# Altium PCB A1.PcbDoc (part 2 of 3)
Units mil, origin at the board's own origin, x right, y up, seen from the top; angles counter-clockwise.
Board outline 3937.01 x 3149.61 mil, 2 copper layers (Top Layer, Bottom Layer); 91 components, 93 nets, 317 pads, 42 vias.
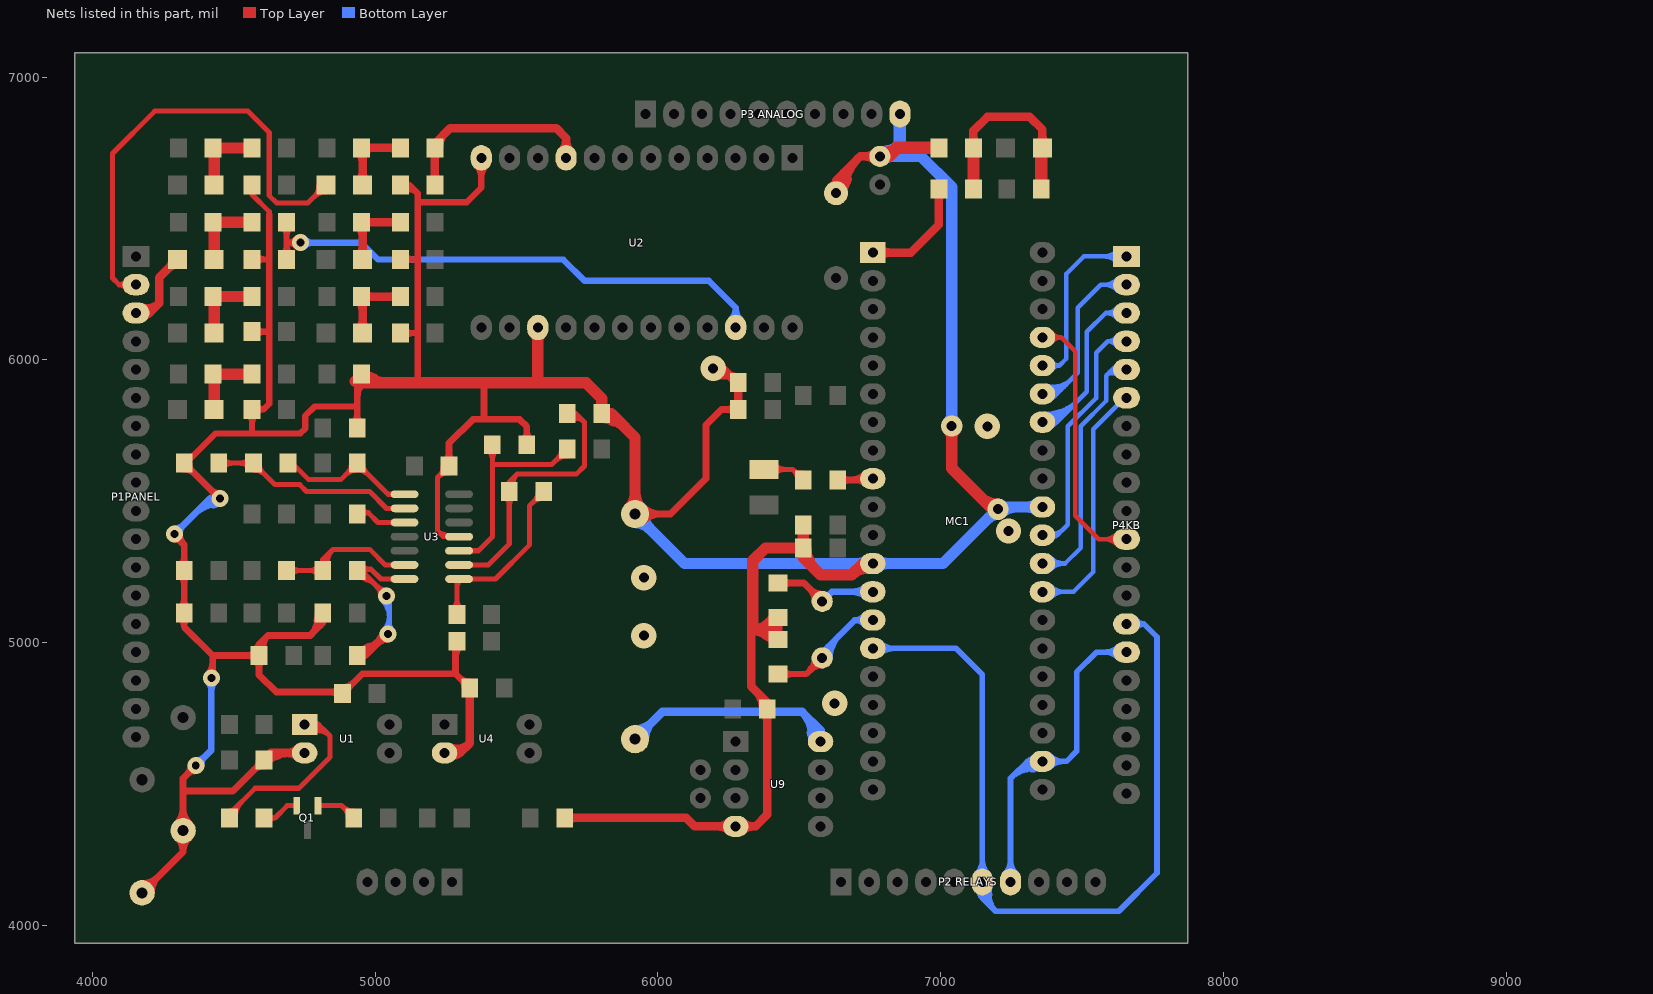
[diagram p2: the nets of this part, all layers, seen from the top]

## Via types
v1: diameter 60, hole 28, Top Layer to Bottom Layer, 31 vias
v2: diameter 90, hole 35.43, Top Layer to Bottom Layer, 6 vias
v3: diameter 75, hole 28, Top Layer to Bottom Layer, 3 vias
v4: diameter 75, hole 35.43, Top Layer to Bottom Layer, 2 vias

## Nets (pads, with @x,y where several pads share a name; then routed paths per layer and width w, separated by ;. In a path a pad name is that pad's centre, name@x,y a point inside that pad or via, vN(x,y) a via of type N, cw(c..) or ccw(c..) an arc to the next point about the centre after c; other vN are vias at no path point) (continued)
GND: "P3 ANALOG.10" BT1.2 C1.1 C2.1 C3.1 C4.1 C5.1 C10.1 C11.1 C12.1 C13.2 C14.1 C15.2 C16.1 C17.1 C18.1 C19.1 C20.1 C21.1 C22.1 C46.1 C57.2 C68.1 C69.1 C70.2 D3.1 D4.1 D9.1 MC1.12 MC1.31 R6.2 R13.1 R19.1 R28.1 R30.2 R64.1 R107.2 R108.1 U1.2 U2.12 U2.15 U3.11 U4.2 U9.4 | length 31016.5
  Top Layer w18: C16.1@4563.98,6618.61 4563.98,6585.56 4625,6524.54 4625,6515 ; 5239.64,5383.88 cw(c5234.41,5357.08) U3.11@5257.06,5372.33 ; C12.1@5261.02,5625 5220,5583.98 ; U3.11@5296.46,5375 5240,5375 5220,5395 ; 5220,5395 ccw(c5257.07,5432.07) 5260.69,5379.77 cw(c5257.07,5432.07) 5220,5395 ; 5220,5395 5220,5583.98 ; 5220,5583.98 cw(c5259.99,5543.99) 5260.75,5600.54 ccw(c5259.99,5543.99) 5220,5583.98 ; 5228.77,5592.74 ccw(c5200.44,5621.06) 5240.5,5621.06 cw(c5200.44,5621.06) 5228.77,5592.74
  Top Layer w22: R6.2@4323.98,5635 4330,5635 4435,5740 4735,5740 4752.2,5757.2 4752.2,5802.2 4785,5835 4931.02,5835 4936.02,5840 ; 4563.98,5748.98 C21.1@4563.98,5825 4605,5825 ; C1.1@4563.98,6100 4625,6100 ; C19.1@4563.98,6355.82 4620.82,6355.82 4625,6360 ; 4625,6515 4625,6360 ; C18.1@5088.98,6095 5150,6095 ; C22.1@5088.98,6355.82 5149.18,6355.82 5150,6355 ; C17.1@5088.98,6618.61 5121.39,6618.61 ; 5150,5919 5150,6095 ; U2.12@5375,6715 5375,6610 5323.14,6558.14 5156.86,6558.14 5150,6565 ; v2@6188.46,5962.44 ccw(c6246.03,6028.97) 6252.37,5941.22 ; v2(6195,5970) 6233.98,5970 C20.1@6283.98,5920 ; v2@6201.08,5959.65 cw(c6217.13,5932.31) 6239.55,5954.73 ; v2@6212.21,5940.68 cw(c6232.02,5906.95) C20.1@6259.67,5934.61 ; v2@6236.2,5958.08 cw(c6204.14,5902.55) C20.1@6266.08,5919.14 ; C20.1@6259.96,5944.36 ccw(c6272.62,5966.3) C20.1@6279.18,5941.83 ; C20.1@6265.94,5919.68 ccw(c6237.19,5912.9) 6251.96,5938.48 ccw(c6262.14,5956.12) C20.1@6273.57,5939.27 ; 4563.98,5776.33 ccw(c4519.25,5776.33) 4550.88,5807.96 cw(c4519.25,5776.33) 4563.98,5776.33 ; 4563.98,5776.33 cw(c4608.71,5776.33) 4577.08,5807.96 ccw(c4608.71,5776.33) 4563.98,5776.33 ; 4605,5825 ccw(c4605,5788.85) 4577.88,5812.75 cw(c4605,5788.85) 4605,5825 ; 4605,5825 cw(c4605,5861.15) 4577.88,5837.25 ccw(c4605,5861.15) 4605,5825 ; 4605,5825 4625,5845 4625,6100 ; 4608.71,6100 ccw(c4608.71,6055.27) 4577.08,6086.9 cw(c4608.71,6055.27) 4608.71,6100 ; 4608.71,6100 cw(c4608.71,6144.73) 4577.08,6113.1 ccw(c4608.71,6144.73) 4608.71,6100 ; 4608.71,6355.82 ccw(c4608.71,6311.09) 4577.08,6342.72 cw(c4608.71,6311.09) 4608.71,6355.82 ; 4608.71,6355.82 cw(c4608.71,6400.55) 4577.08,6368.92 ccw(c4608.71,6400.55) 4608.71,6355.82 ; 4625,6100 4625,6360 ; 5121.39,6618.61 ccw(c5121.39,6599.51) 5104.94,6609.2 cw(c5121.39,6599.51) 5121.39,6618.61 ; 5121.39,6618.61 cw(c5121.39,6637.7) 5104.94,6628.01 ccw(c5121.39,6637.7) 5121.39,6618.61 ; 5121.39,6618.61 5150,6590 ; 5133.71,6095 ccw(c5133.71,6050.27) 5102.08,6081.9 cw(c5133.71,6050.27) 5133.71,6095 ; 5133.71,6095 cw(c5133.71,6139.73) 5102.08,6108.1 ccw(c5133.71,6139.73) 5133.71,6095 ; 5133.71,6355.82 ccw(c5133.71,6311.09) 5102.08,6342.72 cw(c5133.71,6311.09) 5133.71,6355.82 ; 5133.71,6355.82 cw(c5133.71,6400.55) 5102.08,6368.92 ccw(c5133.71,6400.55) 5133.71,6355.82 ; 5150,6095 5150,6355 ; 5150,6355 5150,6565 ; 5150,6565 5150,6590 ; 5150,6590 ccw(c5118.12,6558.12) 5097.46,6598.2 cw(c5118.12,6558.12) 5150,6590 ; 5375,6643.52 ccw(c5311.02,6643.52) 5356.26,6688.76 cw(c5311.02,6643.52) 5375,6643.52 ; 5375,6643.52 cw(c5438.98,6643.52) 5393.74,6688.76 ccw(c5438.98,6643.52) 5375,6643.52 ; C17.1@5087.39,6617.76 cw(c5103.62,6586.24) 5128.69,6611.31 ccw(c5103.62,6586.24) C17.1@5087.39,6617.76 ; v2@6198.93,5958.66 cw(c6218,5903.69) 6259.14,5944.84 ccw(c6218,5903.69) v2@6198.93,5958.66 ; v2@6206.14,5937.88 cw(c6230.79,5866.82) C20.1@6283.98,5920 ccw(c6230.79,5866.82) v2@6206.14,5937.88 ; 6245.63,5958.35 ccw(c6283.98,5996.7) 6283.98,5942.46 cw(c6283.98,5996.7) 6245.63,5958.35 ; C20.1@6255.13,5948.84 cw(c6230.22,5923.94) 6265.45,5923.94 ccw(c6230.22,5923.94) C20.1@6255.13,5948.84
  Top Layer w24: D4.1@4175,4115 4320,4260 ; v1(4290,5385) 4290,5380 4323.98,5346.02 R13.1@4323.98,5255 R108.1@4323.98,5105 4323.98,5056.02 4425,4955 ; R6.2@4323.98,5635 4448.98,5510 v1(4450,5510) ; v1(4365,4565) 4320,4520 4320,4475 ; v1(4420,4875) 4425,4880 4425,4955 ; C13.2@4593.81,4954.63 ccw(c4562.32,4982.7) C13.2@4604.43,4985.11 ; R28.1@4606.02,4585 4496.02,4475 4320,4475 ; R64.1@4793.19,5078.88 cw(c4834.81,5072.07) R64.1@4810.2,5106.32 ; R64.1@4813.98,5105 4813.98,5068.98 ; C10.1@4883.98,4820 4953.98,4890 5283.98,4890 ; C10.1@4886.46,4840 4883.98,4840 4868.98,4825 4650,4825 4588.98,4886.02 C13.2@4588.98,4955 ; C57.2@4939.02,5743 4936.02,5740 C57.2@4936.02,5760 4936.02,5840 4936.02,5935 C5.1@4951.02,5950 ; C5.1@4939.11,5933.21 cw(c4920.93,5913.58) 4944.1,5900.21 ; C12.1@5261.02,5625 5261.02,5706.02 5345,5790 5385,5790 ; C15.2@5288.98,4975 5283.98,4970 5283.98,4890 ; C4.1@5333.98,4840 5283.98,4890 ; 5385,5919 5385,5790 ; R107.2@5536.02,5700 5536.02,5763.98 5510,5790 5385,5790 ; BT1.2@5919,5454.99 6044.99,5454.99 6170,5580 6170,5770 6225,5825 C14.1@6283.98,5825 ; 4231.33,4171.33 ccw(c4287.67,4115) 4208,4115 cw(c4287.67,4115) 4231.33,4171.33 ; 4231.33,4171.33 cw(c4175,4227.67) 4175,4148 ccw(c4175,4227.67) 4231.33,4171.33 ; 4320,4260 ccw(c4251.28,4260) 4297.71,4310.67 cw(c4251.28,4260) 4320,4260 ; 4320,4260 cw(c4388.72,4260) 4342.29,4310.67 ccw(c4388.72,4260) 4320,4260 ; 4320,4260 D3.1@4320,4335 4320,4475 ; 4320,4414.67 ccw(c4399.67,4414.67) 4343.33,4358.33 cw(c4399.67,4414.67) 4320,4414.67 ; 4320,4414.67 cw(c4240.33,4414.67) 4296.67,4358.33 ccw(c4240.33,4414.67) 4320,4414.67 ; 4323.98,5058.75 ccw(c4281.66,5058.75) 4311.58,5088.67 cw(c4281.66,5058.75) 4323.98,5058.75 ; 4323.98,5058.75 cw(c4366.29,5058.75) 4336.37,5088.67 ccw(c4366.29,5058.75) 4323.98,5058.75 ; 4323.98,5151.25 ccw(c4366.29,5151.25) 4336.37,5121.33 cw(c4366.29,5151.25) 4323.98,5151.25 ; 4323.98,5151.25 cw(c4281.66,5151.25) 4311.58,5121.33 ccw(c4281.66,5151.25) 4323.98,5151.25 ; 4323.98,5208.75 ccw(c4281.66,5208.75) 4311.58,5238.67 cw(c4281.66,5208.75) 4323.98,5208.75 ; 4323.98,5208.75 cw(c4366.29,5208.75) 4336.37,5238.67 ccw(c4366.29,5208.75) 4323.98,5208.75 ; 4323.98,5301.25 ccw(c4366.29,5301.25) 4336.37,5271.33 cw(c4366.29,5301.25) 4323.98,5301.25 ; 4323.98,5301.25 cw(c4281.66,5301.25) 4311.58,5271.33 ccw(c4281.66,5301.25) 4323.98,5301.25 ; 4334.27,4534.27 ccw(c4303.54,4565) 4347,4565 cw(c4303.54,4565) 4334.27,4534.27 ; 4334.27,4534.27 cw(c4365,4503.54) 4365,4547 ccw(c4365,4503.54) 4334.27,4534.27 ; 4425,4955 C13.2@4588.98,4955 ; 4546.66,4955 ccw(c4546.66,4997.32) 4576.58,4967.39 cw(c4546.66,4997.32) 4546.66,4955 ; 4546.66,4955 cw(c4546.66,4912.68) 4576.58,4942.61 ccw(c4546.66,4912.68) 4546.66,4955 ; 4588.98,4908.75 ccw(c4546.66,4908.75) 4576.58,4938.67 cw(c4546.66,4908.75) 4588.98,4908.75 ; 4588.98,4908.75 cw(c4631.29,4908.75) 4601.37,4938.67 ccw(c4631.29,4908.75) 4588.98,4908.75 ; C13.2@4588.98,4955 4588.98,4993.98 4620,5025 ; 4588.98,4993.97 ccw(c4615.23,4993.97) 4599.49,4972.96 cw(c4615.23,4993.97) 4588.98,4993.97 ; 4588.98,4993.97 cw(c4562.72,4993.97) 4578.47,4972.96 ccw(c4562.72,4993.97) 4588.98,4993.97 ; 4620,5025 ccw(c4661.95,4983.05) 4605.62,4964.44 cw(c4661.95,4983.05) 4620,5025 ; 4620,5025 4770,5025 ; 4770,5025 ccw(c4704.84,5090.16) 4796.54,5099.32 cw(c4704.84,5090.16) 4770,5025 ; 4770,5025 4813.98,5068.98 ; 4813.98,5068.98 ccw(c4793.37,5068.98) 4804.51,5086.31 cw(c4793.37,5068.98) 4813.98,5068.98 ; 4813.98,5068.98 cw(c4834.58,5068.98) 4823.45,5086.31 ccw(c4834.58,5068.98) 4813.98,5068.98 ; 4936.02,5806.25 ccw(c4978.34,5806.25) 4948.42,5776.33 cw(c4978.34,5806.25) 4936.02,5806.25 ; 4936.02,5806.25 cw(c4893.71,5806.25) 4923.63,5776.33 ccw(c4893.71,5806.25) 4936.02,5806.25 ; 5261.02,5671.25 ccw(c5303.34,5671.25) 5273.42,5641.33 cw(c5303.34,5671.25) 5261.02,5671.25 ; 5261.02,5671.25 cw(c5218.71,5671.25) 5248.63,5641.33 ccw(c5218.71,5671.25) 5261.02,5671.25 ; C15.2@5276.58,4988.67 cw(c5258.73,4970.82) 5283.98,4970.82 ; C15.2@5276.58,4988.67 cw(c5258.73,4970.82) 5283.98,4970.82 ; C15.2@5276.58,4988.67 cw(c5258.73,4970.82) 5283.98,4970.82 ; C15.2@5276.58,4988.67 cw(c5258.73,4970.82) 5283.98,4970.82 ; 5536.02,5746.25 ccw(c5578.34,5746.25) 5548.42,5716.33 cw(c5578.34,5746.25) 5536.02,5746.25 ; 5536.02,5746.25 cw(c5493.71,5746.25) 5523.63,5716.33 ccw(c5493.71,5746.25) 5536.02,5746.25 ; 6010.74,5454.99 ccw(c6010.74,5363.25) 5945.87,5428.12 cw(c6010.74,5363.25) 6010.74,5454.99 ; 6010.74,5454.99 cw(c6010.74,5546.73) 5945.87,5481.86 ccw(c6010.74,5546.73) 6010.74,5454.99 ; 6241.66,5825 ccw(c6241.66,5867.32) 6271.58,5837.39 cw(c6241.66,5867.32) 6241.66,5825 ; 6241.66,5825 cw(c6241.66,5782.68) 6271.58,5812.61 ccw(c6241.66,5782.68) 6241.66,5825 ; v1@4290,5367 cw(c4290,5335.62) 4312.19,5357.81 ccw(c4290,5335.62) v1@4290,5367 ; v1@4308,5384.9 ccw(c4362.54,5384.59) 4323.97,5346.03 cw(c4362.54,5384.59) v1@4308,5384.9 ; R6.2@4323.98,5613.54 cw(c4323.98,5561.72) 4360.62,5598.36 ccw(c4323.98,5561.72) R6.2@4323.98,5613.54 ; R6.2@4341.5,5631.06 ccw(c4374.31,5631.06) 4351.11,5607.86 cw(c4374.31,5631.06) R6.2@4341.5,5631.06 ; v1@4407.27,4887.73 ccw(c4364.47,4930.53) 4425,4930.53 cw(c4364.47,4930.53) v1@4407.27,4887.73 ; 4417.52,5541.45 ccw(c4450,5573.93) 4450,5528 cw(c4450,5573.93) 4417.52,5541.45 ; 4420,5538.98 cw(c4391.02,5510) 4432,5510 ccw(c4391.02,5510) 4420,5538.98 ; 4425,4906.38 ccw(c4451.38,4906.38) 4432.73,4887.73 cw(c4451.38,4906.38) 4425,4906.38 ; 4569.38,4548.36 cw(c4606.02,4511.72) 4606.02,4563.54 ccw(c4606.02,4511.72) 4569.38,4548.36 ; R28.1@4578.89,4557.86 ccw(c4555.69,4581.06) 4588.5,4581.06 cw(c4555.69,4581.06) R28.1@4578.89,4557.86 ; C13.2@4582.83,4956.91 cw(c4620.55,4969.37) 4592.46,4997.46 ccw(c4620.55,4969.37) C13.2@4582.83,4956.91 ; 4805.82,5060.82 ccw(c4769.97,5096.67) 4820.42,5101.71 cw(c4769.97,5096.67) 4805.82,5060.82 ; 4839.09,4825 cw(c4839.09,4779.06) 4871.58,4811.54 ccw(c4839.09,4779.06) 4839.09,4825 ; 4844.23,4825 ccw(c4844.23,4863.69) 4871.58,4836.33 cw(c4844.23,4863.69) 4844.23,4825 ; C10.1@4883.98,4841.46 ccw(c4883.98,4893.28) 4920.62,4856.64 cw(c4883.98,4893.28) C10.1@4883.98,4841.46 ; C10.1@4901.5,4823.94 cw(c4934.31,4823.94) 4911.11,4847.14 ccw(c4934.31,4823.94) C10.1@4901.5,4823.94 ; 4936.02,5867.53 cw(c5029.55,5867.53) 4963.42,5933.67 ccw(c5029.55,5867.53) 4936.02,5867.53 ; 5283.98,4946.68 cw(c5343.36,4946.68) 5301.37,4988.67 ccw(c5343.36,4946.68) 5283.98,4946.68 ; 5283.98,4969.6 cw(c5299.68,4969.6) 5294.62,4984.47 ccw(c5299.68,4969.6) 5283.98,4969.6 ; 5297.33,4876.64 ccw(c5333.98,4913.28) 5333.98,4861.46 cw(c5333.98,4913.28) 5297.33,4876.64 ; C4.1@5306.84,4867.14 cw(c5283.64,4843.94) 5316.45,4843.94 ccw(c5283.64,4843.94) C4.1@5306.84,4867.14
  Top Layer w30: R28.1@4606.02,4585 4631.02,4610 U1.2@4750,4610 ; R28.1@4612.95,4601.71 ccw(c4634.56,4641.58) 4657.24,4602.3 ; U4.2@5245,4610 5300,4610 ; C4.1@5333.98,4840 5333.98,4643.98 5300,4610 ; R30.2@5670,4380 6100,4380 6130,4350 U9.4@6275,4350 6345,4350 6386.02,4391.02 C46.1@6386.02,4765 6386.02,4788.98 6330,4845 6330,5285 6335,5290 ; C14.1@6283.98,5825 C20.1@6283.98,5920 ; C3.1@6425,5011.02 C2.1@6425,5088.98 ; D9.1@6620.55,6615.83 ccw(c6609.73,6645.41) 6640.16,6637.26 ccw(c6665.68,6630.42) D9.1@6648.2,6610.62 ; D9.1@6630,6565 D9.1@6630,6590 6630,6635 ; D9.1@6631.25,6587.83 ccw(c6588.92,6661.15) 6670.69,6639.24 ; C68.1@6815,6720 C68.1@6785,6720 6715,6720 6630,6635 ; 4688.18,4610 ccw(c4688.18,4664.32) 4726.59,4625.91 cw(c4688.18,4664.32) 4688.18,4610 ; 4688.18,4610 cw(c4688.18,4555.68) 4726.59,4594.09 ccw(c4688.18,4555.68) 4688.18,4610 ; 5300,4610 ccw(c5300,4571.11) 5269.91,4595.75 cw(c5300,4571.11) 5300,4610 ; 5300,4610 cw(c5300,4648.89) 5269.91,4624.25 ccw(c5300,4648.89) 5300,4610 ; 5333.98,4800.99 ccw(c5298.9,4800.99) 5323.7,4825.79 cw(c5298.9,4800.99) 5333.98,4800.99 ; 5333.98,4800.99 cw(c5369.05,4800.99) 5344.25,4825.79 ccw(c5369.05,4800.99) 5333.98,4800.99 ; 5705.07,4380 ccw(c5705.07,4344.93) 5680.27,4369.73 cw(c5705.07,4344.93) 5705.07,4380 ; 5705.07,4380 cw(c5705.07,4415.07) 5680.27,4390.27 ccw(c5705.07,4415.07) 5705.07,4380 ; 6213.18,4350 ccw(c6213.18,4404.32) 6251.59,4365.91 cw(c6213.18,4404.32) 6213.18,4350 ; 6213.18,4350 cw(c6213.18,4295.68) 6251.59,4334.09 ccw(c6213.18,4295.68) 6213.18,4350 ; 6283.98,5864.01 ccw(c6319.05,5864.01) 6294.25,5839.21 cw(c6319.05,5864.01) 6283.98,5864.01 ; 6283.98,5864.01 cw(c6248.9,5864.01) 6273.7,5839.21 ccw(c6248.9,5864.01) 6283.98,5864.01 ; 6283.98,5880.99 ccw(c6248.9,5880.99) 6273.7,5905.79 cw(c6248.9,5880.99) 6283.98,5880.99 ; 6283.98,5880.99 cw(c6319.05,5880.99) 6294.25,5905.79 ccw(c6319.05,5880.99) 6283.98,5880.99 ; 6336.82,4350 ccw(c6336.82,4295.68) 6298.41,4334.09 cw(c6336.82,4295.68) 6336.82,4350 ; 6336.82,4350 cw(c6336.82,4404.32) 6298.41,4365.91 ccw(c6336.82,4404.32) 6336.82,4350 ; 6386.02,4725.99 ccw(c6350.95,4725.99) 6375.75,4750.79 cw(c6350.95,4725.99) 6386.02,4725.99 ; 6386.02,4725.99 cw(c6421.1,4725.99) 6396.3,4750.79 ccw(c6421.1,4725.99) 6386.02,4725.99 ; 6425,5046.1 ccw(c6460.07,5046.1) 6435.27,5021.3 cw(c6460.07,5046.1) 6425,5046.1 ; 6425,5046.1 cw(c6389.93,5046.1) 6414.73,5021.3 ccw(c6389.93,5046.1) 6425,5046.1 ; 6425,5053.9 ccw(c6389.93,5053.9) 6414.73,5078.7 cw(c6389.93,5053.9) 6425,5053.9 ; 6425,5053.9 cw(c6460.07,5053.9) 6435.27,5078.7 ccw(c6460.07,5053.9) 6425,5053.9 ; 6630,6635 ccw(c6653.07,6635) 6642.54,6614.47 cw(c6653.07,6635) 6630,6635 ; 6630,6635 cw(c6606.93,6635) 6617.46,6614.47 ccw(c6606.93,6635) 6630,6635 ; 6730.68,6720 ccw(c6730.68,6774.32) 6769.09,6735.91 cw(c6730.68,6774.32) 6730.68,6720 ; 6730.68,6720 cw(c6730.68,6665.68) 6769.09,6704.09 ccw(c6730.68,6665.68) 6730.68,6720 ; R28.1@4616.3,4578.66 cw(c4691.95,4503.01) 4691.95,4610 ccw(c4691.95,4503.01) R28.1@4616.3,4578.66 ; U4.2@5249.45,4603.15 ccw(c5269.03,4647.16) 5303.1,4613.1 cw(c5269.03,4647.16) U4.2@5249.45,4603.15 ; U4.2@5261.65,4630.56 ccw(c5288.05,4689.9) 5333.97,4643.97 cw(c5288.05,4689.9) U4.2@5261.65,4630.56 ; 6347.05,4827.95 cw(c6288.05,4768.94) 6371.5,4768.94 ccw(c6288.05,4768.94) 6347.05,4827.95 ; D9.1@6627.5,6590 cw(c6730.1,6590) 6657.55,6662.55 ccw(c6730.1,6590) D9.1@6627.5,6590 ; D9.1@6657.5,6590 cw(c6832.53,6590) 6708.77,6713.77 ccw(c6832.53,6590) D9.1@6657.5,6590
  Top Layer w40: C5.1@4951.02,5950 4951.02,5919 5150,5919 5385,5919 5574,5919 ; C5.1@4953.49,5936.86 cw(c4967.58,5884.29) 4994.79,5931.42 ; U2.15@5575,6115 5575,5920 5574,5919 ; R19.1@5809.28,5810.83 ccw(c5856.41,5838.04) 5842.32,5785.47 ; BT1.2@5919,5454.99 5919,5726 5835,5810 R19.1@5801.02,5810 5801.02,5863.98 5746,5919 5574,5919 ; 6379.99,5032.07 ccw(c6413.97,5074.58) C3.1@6420.01,5020.49 ; 6384.32,5061.05 cw(c6425.23,5025.16) C2.1@6421.68,5079.47 ; 6420,5045 6335,5045 ; C69.1@6509.21,5322.81 cw(c6482,5275.68) 6534.57,5289.77 ; C11.1@6513.98,5416 C69.1@6513.98,5335 ; MC1.12@6760,5280 6725,5280 6685,5240 ; v4(7039,5766) 7039,5617 7184,5472 v4(7203,5472) ; 5575,6065.25 ccw(c5532.75,6065.25) 5562.63,6095.13 cw(c5532.75,6065.25) 5575,6065.25 ; 5575,6065.25 cw(c5617.25,6065.25) 5587.37,6095.13 ccw(c5617.25,6065.25) 5575,6065.25 ; 5919,5527.42 ccw(c5991.43,5527.42) 5940.21,5476.21 cw(c5991.43,5527.42) 5919,5527.42 ; 5919,5527.42 cw(c5846.57,5527.42) 5897.79,5476.21 ccw(c5846.57,5527.42) 5919,5527.42 ; 6335,5045 cw(c6335,4947.65) 6413.39,5005.37 ccw(c6335,4947.65) 6335,5045 ; 6335,5045 ccw(c6335,5131.44) 6412.52,5093.19 cw(c6335,5131.44) 6335,5045 ; 6335,5045 6335,5290 6380,5335 C69.1@6513.98,5335 ; C69.1@6513.98,5335 6513.98,5301.02 6575,5240 6685,5240 ; 6685,5240 cw(c6740.98,5184.03) 6750.41,5262.62 ccw(c6740.98,5184.03) 6685,5240 ; 7039,5723.75 ccw(c6996.75,5723.75) 7026.63,5753.63 cw(c6996.75,5723.75) 7039,5723.75 ; 7039,5723.75 cw(c7081.25,5723.75) 7051.37,5753.63 ccw(c7081.25,5723.75) 7039,5723.75 ; C5.1@4929.48,5924.52 ccw(c4942.79,5937.83) 4942.79,5919 cw(c4942.79,5937.83) C5.1@4929.48,5924.52 ; C5.1@4957.76,5952.8 ccw(c5039.36,6034.4) 5039.36,5919 cw(c5039.36,6034.4) C5.1@4957.76,5952.8 ; R19.1@5801.02,5796.54 cw(c5801.02,5682) 5882.01,5762.99 ccw(c5801.02,5682) R19.1@5801.02,5796.54 ; C69.1@6523.5,5331.06 ccw(c6619.03,5331.06) 6551.48,5263.52 cw(c6619.03,5331.06) C69.1@6523.5,5331.06 ; 7140.69,5515.31 ccw(c7203,5577.62) 7203,5489.5 cw(c7203,5577.62) 7140.69,5515.31
  Top Layer w44: C68.1@6815,6720 6845,6750 ; C70.2@6993.98,6750 6845,6750 ; 6845,6750 cw(c6803.98,6791.02) 6789,6734.97 ccw(c6803.98,6791.02) 6845,6750
  Bottom Layer w24: v1(4290,5385) 4415,5510 ; v1(4365,4565) 4420,4620 v1(4420,4875) ; 4427.95,5486.09 ccw(c4416.33,5529.44) v1@4455.2,5507 ; v1(4450,5510) 4415,5510 ; 4320.73,5415.73 ccw(c4351.46,5385) 4308,5385 cw(c4351.46,5385) 4320.73,5415.73 ; 4320.73,5415.73 cw(c4290,5446.46) 4290,5403 ccw(c4290,5446.46) 4320.73,5415.73 ; 4395.73,4595.73 ccw(c4426.46,4565) 4383,4565 cw(c4426.46,4565) 4395.73,4595.73 ; 4395.73,4595.73 cw(c4365,4626.46) 4365,4583 ccw(c4365,4626.46) 4395.73,4595.73 ; 4415,5510 ccw(c4415,5535.03) 4435.36,5520.47 cw(c4415,5535.03) 4415,5510 ; 4415,5510 cw(c4415,5484.97) 4435.36,5499.53 ccw(c4415,5484.97) 4415,5510 ; 4420,4831.54 ccw(c4376.54,4831.54) 4407.27,4862.27 cw(c4376.54,4831.54) 4420,4831.54 ; 4420,4831.54 cw(c4463.46,4831.54) 4432.73,4862.27 ccw(c4463.46,4831.54) 4420,4831.54 ; 4359.52,5454.52 cw(c4450,5364.05) 4450,5492 ccw(c4450,5364.05) 4359.52,5454.52 ; 4400.49,5495.49 cw(c4450,5445.99) 4450,5516 ccw(c4450,5445.99) 4400.49,5495.49
  Bottom Layer w40: BT1.2@5919,5454.99 6093.99,5280 MC1.12@6760,5280 7008,5280 7208,5480 v4@7211,5480 ; C68.1@6815,6720 6931,6720 7039,6612 v4(7039,5766) ; v4(7203,5472) v4@7211,5480 ; MC1.31@7360,5480 v4@7211,5480 ; 5970.21,5403.78 ccw(c5919,5352.57) 5919,5424.99 cw(c5919,5352.57) 5970.21,5403.78 ; 5970.21,5403.78 cw(c6021.43,5454.99) 5949,5454.99 ccw(c6021.43,5454.99) 5970.21,5403.78 ; 6710.25,5280 ccw(c6710.25,5322.25) 6740.13,5292.37 cw(c6710.25,5322.25) 6710.25,5280 ; 6710.25,5280 cw(c6710.25,5237.75) 6740.13,5267.63 ccw(c6710.25,5237.75) 6710.25,5280 ; 6809.75,5280 ccw(c6809.75,5237.75) 6779.87,5267.63 cw(c6809.75,5237.75) 6809.75,5280 ; 6809.75,5280 cw(c6809.75,5322.25) 6779.87,5292.37 ccw(c6809.75,5322.25) 6809.75,5280 ; 6827.25,6720 ccw(c6827.25,6677.75) 6797.37,6707.63 cw(c6827.25,6677.75) 6827.25,6720 ; 6827.25,6720 cw(c6827.25,6762.25) 6797.37,6732.37 ccw(c6827.25,6762.25) 6827.25,6720 ; 7039,5808.25 ccw(c7081.25,5808.25) 7051.37,5778.37 cw(c7081.25,5808.25) 7039,5808.25 ; 7039,5808.25 cw(c6996.75,5808.25) 7026.63,5778.37 ccw(c6996.75,5808.25) 7039,5808.25 ; 7310.25,5480 ccw(c7310.25,5522.25) 7340.13,5492.37 cw(c7310.25,5522.25) 7310.25,5480 ; 7310.25,5480 cw(c7310.25,5437.75) 7340.13,5467.63 ccw(c7310.25,5437.75) 7310.25,5480 ; 7168,5440 cw(c7203,5405.01) 7203,5454.5 ccw(c7203,5405.01) 7168,5440 ; v4@7215.37,5459.63 cw(c7264.56,5410.44) 7264.56,5480 ccw(c7264.56,5410.44) v4@7215.37,5459.63
  Bottom Layer w44: C68.1@6815,6720 6855.91,6760.91 ; 6855.91,6870.08 6855.91,6760.91 ; 6855.9,6760.9 cw(c6793.69,6823.12) 6786.3,6735.45 ccw(c6793.69,6823.12) 6855.9,6760.9
  other v2: 6625,4785 5950,5025 5950,5230 7240,5395 7165,5765
HT: C17.2 R11.2 U2.9 | length 1210.2
  Top Layer w30: C17.2@5211.02,6618.61 R11.2@5211.02,6750 5211.02,6766.02 5265,6820 5640,6820 5675,6785 U2.9@5675,6715 ; 5211.02,6657.62 ccw(c5246.1,6657.62) 5221.3,6632.82 cw(c5246.1,6657.62) 5211.02,6657.62 ; 5211.02,6657.62 cw(c5175.95,6657.62) 5200.75,6632.82 ccw(c5175.95,6657.62) 5211.02,6657.62 ; 5211.02,6710.99 ccw(c5175.95,6710.99) 5200.75,6735.79 cw(c5175.95,6710.99) 5211.02,6710.99 ; 5211.02,6710.99 cw(c5246.1,6710.99) 5221.3,6735.79 ccw(c5246.1,6710.99) 5211.02,6710.99 ; 5675,6776.82 ccw(c5729.32,6776.82) 5690.91,6738.41 cw(c5729.32,6776.82) 5675,6776.82 ; 5675,6776.82 cw(c5620.68,6776.82) 5659.09,6738.41 ccw(c5620.68,6776.82) 5675,6776.82 ; R11.2@5225.55,6753.94 cw(c5289.8,6753.94) 5244.37,6799.37 ccw(c5289.8,6753.94) R11.2@5225.55,6753.94
HTIN: D65.2 P1PANEL.2 | length 1949.2
  Top Layer w18: P1PANEL.2@4153.54,6266.14 4093.86,6266.14 ; D65.2@4825.04,6618.61 4761.43,6555 4651.28,6555 4625,6581.28 4625,6805 4550,6880 4220,6880 4070,6730 4070,6290 4093.86,6266.14 ; 4093.86,6266.14 ccw(c4093.86,6295.2) 4118.94,6280.53 cw(c4093.86,6295.2) 4093.86,6266.14 ; 4093.86,6266.14 cw(c4093.86,6237.08) 4118.94,6251.75 ccw(c4093.86,6237.08) 4093.86,6266.14 ; 4783.28,6576.84 ccw(c4741.51,6618.61) 4800.58,6618.61 cw(c4741.51,6618.61) 4783.28,6576.84 ; 4783.28,6576.84 cw(c4825.04,6535.08) 4825.04,6594.14 ccw(c4825.04,6535.08) 4783.28,6576.84
LCD_DB#4: MC1.34 P4KB.3 | length 1344.6
  Bottom Layer w16: MC1.34@7360,5780 7410,5780 ; MC1.34@7367.28,5777.51 ccw(c7373.83,5853.02) 7427.42,5799.42 ; MC1.34@7367.5,5761.5 ccw(c7367.5,5819.44) 7408.47,5778.47 ; MC1.34@7367.5,5777.5 ccw(c7367.5,5874.07) 7435.78,5805.78 ; MC1.34@7367.5,5793.5 ccw(c7367.5,5928.7) 7463.1,5833.1 ; MC1.34@7367.5,5809.5 ccw(c7367.5,5983.32) 7490.41,5860.41 ; MC1.34@7368.67,5793.45 ccw(c7377.71,5897.71) 7451.71,5823.71 ; MC1.34@7379.08,5773.06 cw(c7433.65,5740.34) 7422.56,5802.99 ; MC1.34@7384.4,5804.18 ccw(c7399.7,5826.06) 7404.36,5799.77 ; MC1.34@7395.14,5769.68 cw(c7410,5764.14) 7410,5780 ; MC1.34@7395.14,5790.32 ccw(c7410,5795.86) 7410,5780 ; MC1.34@7395.58,5770.95 cw(c7408,5766.95) 7408,5780 cw(c7408,5793.05) MC1.34@7395.58,5789.05 ; P4KB.3@7625.05,6146.98 ccw(c7583.47,6111.44) 7583.47,6166.14 ; P4KB.3@7625.05,6185.31 cw(c7583.47,6220.84) 7583.47,6166.14 ; P4KB.3@7657.48,6166.14 7583.46,6166.14 ; 7410,5780 7517,5887 7517,6099.68 7583.46,6166.14
LCD_DB#5: MC1.30 P4KB.4 | length 1140.2
  Bottom Layer w16: MC1.30@7360,5380 7413,5380 ; MC1.30@7366.32,5377.8 ccw(c7387.22,5416.81) 7418.52,5385.52 ; MC1.30@7373.87,5391.9 ccw(c7397.85,5436.66) 7433.76,5400.76 7450,5417 7450,5765.25 7550,5865.25 7550,6025 7591.14,6066.14 ; P4KB.4@7623.23,6049.34 ccw(c7591.14,6027.1) 7591.14,6066.14 ; P4KB.4@7623.23,6082.94 cw(c7591.14,6105.18) 7591.14,6066.14 ; P4KB.4@7657.48,6066.14 7591.14,6066.14 ; 7413,5380 ccw(c7413,5359.66) 7394.43,5367.96 cw(c7413,5359.66) 7413,5380 ; 7413,5380 cw(c7413,5400.34) 7394.43,5392.04 ccw(c7413,5400.34) 7413,5380
LCD_DB#6: MC1.29 P4KB.5 | length 1093.2
  Bottom Layer w16: MC1.29@7388.36,5259.14 cw(c7438.72,5208.78) 7438.72,5280 ; MC1.29@7388.36,5300.86 ccw(c7438.72,5351.22) 7438.72,5280 ; 7596.39,5956.39 cw(c7617.27,5935.52) P4KB.5@7638,5956.53 ; 7607.78,5967.78 cw(c7628.58,5946.98) P4KB.5@7649.24,5967.92 ; P4KB.5@7619.58,5956.55 ccw(c7606.14,5951.93) 7606.14,5966.14 ; P4KB.5@7619.58,5975.73 cw(c7606.14,5980.35) 7606.14,5966.14 ; P4KB.5@7626.76,5945.14 ccw(c7605.95,5924.05) 7585,5945 ; P4KB.5@7657.48,5966.14 7606.14,5966.14 ; 7438.72,5280 7440,5280 7495,5335 7495,5765 7585,5855 7585,5945 ; 7585,5945 7606.14,5966.14
LCD_DB#7: MC1.28 P4KB.6 | length 910.7
  Bottom Layer w16: MC1.28@7388.36,5159.14 cw(c7438.72,5108.78) 7438.72,5180 ; MC1.28@7388.36,5200.86 ccw(c7438.72,5251.22) 7438.72,5180 ; P4KB.6@7657.48,5866.14 7651.14,5866.14 7540,5755 7540,5250 7470,5180 7438.72,5180
LCD_E#: MC1.35 P4KB.2 | length 1518.4
  Bottom Layer w16: MC1.35@7362.9,5862.08 ccw(c7373.71,5904.2) 7404.45,5873.45 ; MC1.35@7366.88,5877.58 ccw(c7381.81,5935.78) 7424.29,5893.29 ; MC1.35@7367.36,5861.5 ccw(c7367.82,5921.08) 7409.95,5878.95 ; MC1.35@7367.48,5877.5 ccw(c7368.24,5974.69) 7436.96,5905.96 ; MC1.35@7367.61,5893.5 ccw(c7368.66,6028.3) 7463.98,5932.98 ; MC1.35@7370.85,5893.08 ccw(c7389.91,5967.37) 7444.14,5913.14 ; MC1.35@7374.83,5908.58 ccw(c7398.01,5998.95) 7463.98,5932.98 ; MC1.35@7379.42,5873.67 cw(c7439.78,5841.64) 7422.61,5907.78 ; MC1.35@7382.45,5905.43 ccw(c7395.98,5928.45) 7402.69,5902.61 ; MC1.35@7391.88,5896.6 ccw(c7407.29,5907.1) 7411.98,5889.05 ccw(c7417.5,5867.79) MC1.35@7396.16,5873 ; P4KB.2@7626.62,6245.28 ccw(c7576.26,6194.92) 7576.26,6266.14 ccw(c7576.26,6337.36) P4KB.2@7626.62,6287 ; P4KB.2@7657.48,6266.14 7566.14,6266.14 7485,6185 7485,5954 7463.98,5932.98 ; MC1.35@7394.91,5869.09 cw(c7411,5862.68) 7411,5880 ; MC1.35@7394.91,5869.09 cw(c7411,5862.68) 7411,5880 ; MC1.35@7394.91,5869.09 cw(c7411,5862.68) 7411,5880 ; MC1.35@7394.91,5890.91 ccw(c7411,5897.32) 7411,5880 ; MC1.35@7394.91,5890.91 ccw(c7411,5897.32) 7411,5880 ; MC1.35@7394.91,5890.91 ccw(c7411,5897.32) 7411,5880 ; 7411,5880 MC1.35@7360,5880 7411,5880 ; 7411,5880 7463.98,5932.98
LCD_RS#: MC1.36 P4KB.1 | length 810.5
  Bottom Layer w16: MC1.36@7360,5980 7420,5980 ; MC1.36@7392.7,5964.66 cw(c7420,5948.04) 7420,5980 ; MC1.36@7392.7,5995.34 ccw(c7420,6011.96) 7420,5980 ; P4KB.1@7626.62,6345.28 ccw(c7576.26,6294.92) 7576.26,6366.14 ccw(c7576.26,6437.36) P4KB.1@7626.62,6387 ; P4KB.1@7657.48,6366.14 7506.14,6366.14 7445,6305 7445,6005 7420,5980
LED: MC1.9 R3.2 | length 452.4
  Top Layer w24: R3.2@6636.02,5575 6755,5575 MC1.9@6760,5580 ; 6678.34,5575 ccw(c6678.34,5532.68) 6648.42,5562.61 cw(c6678.34,5532.68) 6678.34,5575 ; 6678.34,5575 cw(c6678.34,5617.32) 6648.42,5587.39 ccw(c6678.34,5617.32) 6678.34,5575 ; 6678.87,5575 ccw(c6678.87,5653.63) 6734.47,5598.03 cw(c6678.87,5653.63) 6678.87,5575 ; 6703.01,5575 cw(c6703.01,5530.51) 6734.47,5561.97 ccw(c6703.01,5530.51) 6703.01,5575
LLOP: C19.2 R18.2 U2.22 | length 2648.8
  Top Layer w22: C19.2@4686.02,6355.82 4686.02,6415 ; R18.2@4686.02,6487.21 4686.02,6415 ; v1(4735,6415) 4686.02,6415 ; 4686.02,6404.48 ccw(c4730.75,6404.48) 4699.12,6372.86 cw(c4730.75,6404.48) 4686.02,6404.48 ; 4686.02,6404.48 cw(c4641.29,6404.48) 4672.92,6372.86 ccw(c4641.29,6404.48) 4686.02,6404.48 ; 4686.02,6438.55 ccw(c4641.29,6438.55) 4672.92,6470.17 cw(c4641.29,6438.55) 4686.02,6438.55 ; 4686.02,6438.55 cw(c4730.75,6438.55) 4699.12,6470.17 ccw(c4730.75,6438.55) 4686.02,6438.55 ; 4689.13,6415 ccw(c4689.13,6460.87) 4721.56,6428.44 cw(c4689.13,6460.87) 4689.13,6415 ; 4689.13,6415 cw(c4689.13,6369.13) 4721.56,6401.56 ccw(c4689.13,6369.13) 4689.13,6415
  Bottom Layer w22: v1(4735,6415) 4950,6415 5010,6355 5665,6355 5740,6280 6180,6280 6275,6185 ; U2.22@6275,6115 6275,6185 ; 4780.87,6415 ccw(c4780.87,6369.13) 4748.44,6401.56 cw(c4780.87,6369.13) 4780.87,6415 ; 4780.87,6415 cw(c4780.87,6460.87) 4748.44,6428.44 ccw(c4780.87,6460.87) 4780.87,6415 ; 6275,6185 ccw(c6335.45,6185) 6293.42,6141.55 cw(c6335.45,6185) 6275,6185 ; 6275,6185 cw(c6214.55,6185) 6256.58,6141.55 ccw(c6214.55,6185) 6275,6185
LLOPIN: D2.2 P1PANEL.3 | length 732.6
  Top Layer w30: P1PANEL.3@4153.54,6166.14 4201.14,6166.14 ; D2.2@4300.04,6355.82 4235,6290.78 4235,6200 ; 4201.14,6166.14 ccw(c4201.14,6145.98) 4183.37,6155.51 cw(c4201.14,6145.98) 4201.14,6166.14 ; 4201.14,6166.14 cw(c4201.14,6186.3) 4183.37,6176.78 ccw(c4201.14,6186.3) 4201.14,6166.14 ; 4201.14,6166.14 4235,6200 ; 4235,6200 cw(c4193.61,6241.38) 4171.89,6187.04 ccw(c4193.61,6241.38) 4235,6200 ; D2.2@4268.52,6324.3 ccw(c4237,6355.82) 4281.58,6355.82 cw(c4237,6355.82) D2.2@4268.52,6324.3 ; D2.2@4268.52,6324.3 cw(c4300.04,6292.78) 4300.04,6337.35 ccw(c4300.04,6292.78) D2.2@4268.52,6324.3 ; P1PANEL.3@4160.76,6159.18 ccw(c4175.24,6195.4) 4202.82,6167.82 cw(c4175.24,6195.4) P1PANEL.3@4160.76,6159.18
MANUAL_R: "P2 RELAYS.6" MC1.15 P4KB.14 | length 3947.6
  Bottom Layer w20: MC1.15@6760,4980 7054,4980 7147.24,4886.76 7147.24,4153.54 7147.24,4097.76 ; 7156.37,4152.09 cw(c7112.2,4110.72) 7172.69,4108.74 ; P4KB.14@7657.48,5066.14 7718.86,5066.14 ; P4KB.14@7690.36,5050.89 cw(c7718.86,5031.9) 7718.86,5066.14 ; P4KB.14@7690.36,5081.39 ccw(c7718.86,5100.38) 7718.86,5066.14 ; 6833.89,4980 ccw(c6833.89,4913.61) 6786.95,4960.55 cw(c6833.89,4913.61) 6833.89,4980 ; 6833.89,4980 cw(c6833.89,5046.39) 6786.95,4999.45 ccw(c6833.89,5046.39) 6833.89,4980 ; 7147.24,4097.76 ccw(c7122.88,4097.76) 7134.33,4119.27 cw(c7122.88,4097.76) 7147.24,4097.76 ; 7147.24,4097.76 cw(c7171.61,4097.76) 7160.16,4119.27 ccw(c7171.61,4097.76) 7147.24,4097.76 ; 7147.24,4097.76 7195,4050 ; 7147.24,4229.93 ccw(c7213.63,4229.93) 7166.69,4182.99 cw(c7213.63,4229.93) 7147.24,4229.93 ; 7147.24,4229.93 cw(c7080.85,4229.93) 7127.8,4182.99 ccw(c7080.85,4229.93) 7147.24,4229.93 ; 7195,4050 cw(c7255.66,4110.67) 7173.56,4135.56 ccw(c7255.66,4110.67) 7195,4050 ; 7195,4050 7630,4050 7765,4185 7765,5020 7718.86,5066.14 ; 7135.28,4147.17 ccw(c7183.24,4132.63) 7147.8,4097.2 cw(c7183.24,4132.63) 7135.28,4147.17 ; 7154.42,4141.37 ccw(c7219.45,4121.65) 7171.4,4073.6 cw(c7219.45,4121.65) 7154.42,4141.37
MCONTACT: "P2 RELAYS.7" MC1.22 P4KB.15 | length 2331.4
  Bottom Layer w20: 7247.24,4153.54 7247.24,4520.24 ; 7304.59,4567.83 cw(c7308.81,4526.39) MC1.22@7335.13,4558.68 ; 7321.42,4550.13 ccw(c7315.28,4610.33) MC1.22@7362.19,4572.1 ; P4KB.15@7628.03,4946.7 ccw(c7581.09,4899.75) 7581.09,4966.14 ccw(c7581.09,5032.53) P4KB.15@7628.03,4985.59 ; P4KB.15@7657.48,4966.14 7551.14,4966.14 7481,4896 7481,4616 7445,4580 MC1.22@7360,4580 7307,4580 ; 7247.24,4229.93 ccw(c7313.63,4229.93) 7266.69,4182.99 cw(c7313.63,4229.93) 7247.24,4229.93 ; 7247.24,4229.93 cw(c7180.85,4229.93) 7227.8,4182.99 ccw(c7180.85,4229.93) 7247.24,4229.93 ; 7247.25,4520.25 cw(c7329.56,4437.94) 7348.12,4552.85 ccw(c7329.56,4437.94) 7247.25,4520.25 ; 7247.24,4520.24 7307,4580 ; 7307,4580 ccw(c7307,4603.89) 7328.15,4592.78 cw(c7307,4603.89) 7307,4580 ; 7307,4580 cw(c7307,4556.11) 7328.15,4567.22 ccw(c7307,4556.11) 7307,4580 ; 7433.89,4580 ccw(c7433.89,4513.61) 7386.95,4560.55 cw(c7433.89,4513.61) 7433.89,4580 ; 7433.89,4580 cw(c7433.89,4646.39) 7386.95,4599.45 ccw(c7433.89,4646.39) 7433.89,4580 ; 7274.9,4547.9 cw(c7337.25,4485.55) 7351.3,4572.6 ccw(c7337.25,4485.55) 7274.9,4547.9 ; 7302.55,4575.55 cw(c7344.94,4533.17) 7354.49,4592.34 ccw(c7344.94,4533.17) 7302.55,4575.55
MENU: MC1.37 P4KB.11 | length 1212.6
  Top Layer w16: MC1.37@7360,6080 7427,6080 ; P4KB.11@7626.62,5345.28 ccw(c7576.26,5294.92) 7576.26,5366.14 ccw(c7576.26,5437.36) P4KB.11@7626.62,5387 ; P4KB.11@7657.48,5366.14 7558.86,5366.14 7476,5449 7476,6031 7427,6080 ; 7427,6080 ccw(c7427,6034.75) 7390.98,6062.14 cw(c7427,6034.75) 7427,6080 ; 7427,6080 cw(c7427,6125.25) 7390.98,6097.86 ccw(c7427,6125.25) 7427,6080
NetBT1_1: BT1.1 U9.8 | length 1561.9
  Top Layer w30: BT1.1@5919,4658.73 BT1.1@5939.77,4679.5
  Bottom Layer w30: BT1.1@5919,4658.73 6015.27,4755 6510,4755 ; 6541.22,4681.02 ccw(c6596.77,4688.79) U9.8@6562.98,4644.01 ; U9.8@6575,4650 6575,4690 ; 5978.75,4718.48 ccw(c6038.5,4658.73) 5954,4658.73 cw(c6038.5,4658.73) 5978.75,4718.48 ; 5978.75,4718.48 cw(c5919,4778.23) 5919,4693.73 ccw(c5919,4778.23) 5978.75,4718.48 ; 6510,4755 cw(c6422.86,4667.86) 6545.17,4652.76 ccw(c6422.86,4667.86) 6510,4755 ; 6510,4755 6575,4690 ; 6575,4690 ccw(c6599.3,4690) 6586.68,4669.23 cw(c6599.3,4690) 6575,4690 ; 6575,4690 cw(c6550.7,4690) 6563.32,4669.23 ccw(c6550.7,4690) 6575,4690 ; 6553.46,4711.54 cw(c6500.23,4658.31) 6574.94,4649.08 ccw(c6500.23,4658.31) 6553.46,4711.54
NetC2_2: C2.2 MC1.13 Y1.2 | length 997.1
  Top Layer w24: C2.2@6425,5211.02 6515.98,5211.02 Y1.2@6581,5146 ; 6546.26,5180.47 ccw(c6590.49,5192.32) Y1.2@6581.3,5147.47 ; 6546.53,5180.74 cw(c6534.68,5136.51) Y1.2@6579.53,5145.7 ; 6471.25,5211.02 ccw(c6471.25,5168.71) 6441.33,5198.63 cw(c6471.25,5168.71) 6471.25,5211.02 ; 6471.25,5211.02 cw(c6471.25,5253.34) 6441.33,5223.42 ccw(c6471.25,5253.34) 6471.25,5211.02 ; 6537.47,5189.53 ccw(c6581,5233.06) 6581,5171.5 cw(c6581,5233.06) 6537.47,5189.53 ; 6537.47,5189.53 cw(c6493.94,5146) 6555.5,5146 ccw(c6493.94,5146) 6537.47,5189.53
  Bottom Layer w24: Y1.2@6581,5146 6615,5180 MC1.13@6760,5180 ; 6690.94,5180 ccw(c6690.94,5241.56) 6734.47,5198.03 cw(c6690.94,5241.56) 6690.94,5180 ; 6690.94,5180 cw(c6690.94,5118.44) 6734.47,5161.97 ccw(c6690.94,5118.44) 6690.94,5180
NetC3_2: C3.2 MC1.14 Y1.1 | length 1371.5
  Top Layer w22: C3.2@6425,4888.98 6523.98,4888.98 Y1.1@6581,4946 ; 6540.58,4908.67 ccw(c6527.65,4956.93) Y1.1@6576.59,4946.9 ; 6543.67,4905.58 cw(c6591.93,4892.65) Y1.1@6581.9,4941.59 ; 6473.67,4888.98 ccw(c6473.67,4844.25) 6442.04,4875.88 cw(c6473.67,4844.25) 6473.67,4888.98 ; 6473.67,4888.98 cw(c6473.67,4933.71) 6442.04,4902.08 ccw(c6473.67,4933.71) 6473.67,4888.98 ; 6535.76,4900.76 ccw(c6490.52,4946) 6554.5,4946 cw(c6490.52,4946) 6535.76,4900.76 ; 6535.76,4900.76 cw(c6581,4855.52) 6581,4919.5 ccw(c6581,4855.52) 6535.76,4900.76
  Bottom Layer w22: Y1.1@6579.2,4950.13 ccw(c6549.17,5019.15) 6621.88,4999.67 ; Y1.1@6581,4946 6581,4965 6696,5080 ; MC1.14@6760,5080 6696,5080 ; 6696,5080 ccw(c6696,5126.97) 6732.12,5096.94 cw(c6696,5126.97) 6696,5080 ; 6696,5080 cw(c6696,5033.03) 6732.12,5063.06 ccw(c6696,5033.03) 6696,5080 ; Y1.1@6585.5,4946 cw(c6642.23,4946) 6602.12,4986.12 ccw(c6642.23,4946) Y1.1@6585.5,4946 ; Y1.1@6607.5,4946 cw(c6717.35,4946) 6639.67,5023.67 ccw(c6717.35,4946) Y1.1@6607.5,4946
NetC70_1: C70.1 D67.1 R1.2 R76.2 | length 1015.4
  Top Layer w30: C70.1@7116.02,6750 7116.02,6811.02 7165,6860 7315,6860 7359.96,6815.04 D67.1@7359.96,6750 ; 7116.02,6789.01 ccw(c7151.1,6789.01) 7126.3,6764.21 cw(c7151.1,6789.01) 7116.02,6789.01 ; 7116.02,6789.01 cw(c7080.95,6789.01) 7105.75,6764.21 ccw(c7080.95,6789.01) 7116.02,6789.01 ; 7359.96,6794.58 ccw(c7404.54,6794.58) 7373.02,6763.06 cw(c7404.54,6794.58) 7359.96,6794.58 ; 7359.96,6794.58 cw(c7315.38,6794.58) 7346.91,6763.06 ccw(c7315.38,6794.58) 7359.96,6794.58
  Top Layer w44: R1.2@7116.02,6605 C70.1@7116.02,6750 ; R76.2@7356.02,6605 7356.02,6746.06 D67.1@7359.96,6750 ; 7356.02,6712.82 cw(c7397.15,6712.82) 7368.07,6741.89 ccw(c7397.15,6712.82) 7356.02,6712.82
NetD1_2: D1.2 R3.1 | length 483.5
  Top Layer w18: D1.2@6375,5612.99 6475.98,5612.99 ; R3.1@6513.98,5575 6475.98,5612.99 ; 6451.78,5612.99 ccw(c6451.78,5553.93) 6410.02,5595.69 cw(c6451.78,5553.93) 6451.78,5612.99 ; 6451.78,5612.99 cw(c6451.78,5672.05) 6410.02,5630.29 ccw(c6451.78,5672.05) 6451.78,5612.99 ; 6475.99,5612.99 ccw(c6509.07,5646.08) 6512.48,5599.41 cw(c6509.07,5646.08) 6475.99,5612.99 ; 6481.72,5607.26 cw(c6453.4,5578.94) 6493.45,5578.94 ccw(c6453.4,5578.94) 6481.72,5607.26
NetD2_1: D2.1 R7.2 R18.1 | length 328.2
  Top Layer w40: D2.1@4429.96,6355.82 4429.96,6483.28 R7.2@4426.02,6487.21 R18.1@4563.98,6487.21 ; R7.2@4419.29,6476.54 cw(c4393.52,6450.77) 4429.96,6450.77 ccw(c4393.52,6450.77) R7.2@4419.29,6476.54
NetD5_1: D5.1 R12.1 R14.2 | length 326.2
  Top Layer w40: D5.1@4429.96,6095 4429.96,6220.49 R14.2@4426.02,6224.43 R12.1@4563.98,6224.43 ; R14.2@4419.29,6213.75 cw(c4393.52,6187.99) 4429.96,6187.99 ccw(c4393.52,6187.99) R14.2@4419.29,6213.75
NetD8_1: D8.1 R15.1 R20.2 | length 707.6
  Top Layer w30: D8.1@4954.96,6355.82 4954.96,6483.28 R20.2@4951.02,6487.21 R15.1@5088.98,6487.21 ; 4954.96,6400.4 ccw(c4999.54,6400.4) 4968.02,6368.87 cw(c4999.54,6400.4) 4954.96,6400.4 ; 4954.96,6400.4 cw(c4910.38,6400.4) 4941.9,6368.87 ccw(c4910.38,6400.4) 4954.96,6400.4 ; 4986.1,6487.21 ccw(c4986.1,6452.14) 4961.3,6476.94 cw(c4986.1,6452.14) 4986.1,6487.21 ; 4986.1,6487.21 cw(c4986.1,6522.28) 4961.3,6497.48 ccw(c4986.1,6522.28) 4986.1,6487.21 ; 5053.9,6487.21 ccw(c5053.9,6522.28) 5078.7,6497.48 cw(c5053.9,6522.28) 5053.9,6487.21 ; 5053.9,6487.21 cw(c5053.9,6452.14) 5078.7,6476.94 ccw(c5053.9,6452.14) 5053.9,6487.21 ; R20.2@4940.75,6473 cw(c4906.45,6438.7) 4954.96,6438.7 ccw(c4906.45,6438.7) R20.2@4940.75,6473
NetD10_1: D10.1 R22.1 R120.1 | length 321.8
  Top Layer w40: D10.1@4429.96,5825 4429.96,5946.06 R120.1@4426.02,5950 R22.1@4563.98,5950 ; R120.1@4419.29,5939.33 cw(c4393.52,5913.56) 4429.96,5913.56 ccw(c4393.52,5913.56) R120.1@4419.29,5939.33
NetD11_1: D11.1 R17.1 R23.2 | length 705.6
  Top Layer w30: D11.1@4954.96,6095 4954.96,6220.49 R23.2@4951.02,6224.43 R17.1@5088.98,6224.43 ; 4954.96,6139.58 ccw(c4999.54,6139.58) 4968.02,6108.06 cw(c4999.54,6139.58) 4954.96,6139.58 ; 4954.96,6139.58 cw(c4910.38,6139.58) 4941.9,6108.06 ccw(c4910.38,6139.58) 4954.96,6139.58 ; 4986.1,6224.43 ccw(c4986.1,6189.35) 4961.3,6214.15 cw(c4986.1,6189.35) 4986.1,6224.43 ; 4986.1,6224.43 cw(c4986.1,6259.5) 4961.3,6234.7 ccw(c4986.1,6259.5) 4986.1,6224.43 ; 5053.9,6224.43 ccw(c5053.9,6259.5) 5078.7,6234.7 cw(c5053.9,6259.5) 5053.9,6224.43 ; 5053.9,6224.43 cw(c5053.9,6189.35) 5078.7,6214.15 ccw(c5053.9,6189.35) 5053.9,6224.43 ; R23.2@4940.75,6210.22 cw(c4906.45,6175.91) 4954.96,6175.91 ccw(c4906.45,6175.91) R23.2@4940.75,6210.22
NetD64_1: D64.1 R9.1 R121.1 | length 328.2
  Top Layer w40: D64.1@4429.96,6618.61 4429.96,6746.06 R121.1@4426.02,6750 R9.1@4563.98,6750 ; R121.1@4419.29,6739.33 cw(c4393.52,6713.56) 4429.96,6713.56 ccw(c4393.52,6713.56) R121.1@4419.29,6739.33
NetD65_1: D65.1 R11.1 R122.1 | length 707.6
  Top Layer w30: D65.1@4954.96,6618.61 4954.96,6746.06 R122.1@4951.02,6750 R11.1@5088.98,6750 ; 4954.96,6663.18 ccw(c4999.54,6663.18) 4968.02,6631.66 cw(c4999.54,6663.18) 4954.96,6663.18 ; 4954.96,6663.18 cw(c4910.38,6663.18) 4941.9,6631.66 ccw(c4910.38,6663.18) 4954.96,6663.18 ; 4986.1,6750 ccw(c4986.1,6714.93) 4961.3,6739.73 cw(c4986.1,6714.93) 4986.1,6750 ; 4986.1,6750 cw(c4986.1,6785.07) 4961.3,6760.27 ccw(c4986.1,6785.07) 4986.1,6750 ; 5053.9,6750 ccw(c5053.9,6785.07) 5078.7,6760.27 cw(c5053.9,6785.07) 5053.9,6750 ; 5053.9,6750 cw(c5053.9,6714.93) 5078.7,6739.73 ccw(c5053.9,6714.93) 5053.9,6750 ; R122.1@4940.75,6735.79 cw(c4906.45,6701.49) 4954.96,6701.49 ccw(c4906.45,6701.49) R122.1@4940.75,6735.79
NetMC1_1: MC1.1 R1.1 | length 681.8
  Top Layer w30: MC1.1@6760,6380 6895,6380 6993.98,6478.98 R1.1@6993.98,6605 ; 6821.82,6380 ccw(c6821.82,6325.68) 6783.41,6364.09 cw(c6821.82,6325.68) 6821.82,6380 ; 6821.82,6380 cw(c6821.82,6434.32) 6783.41,6395.91 ccw(c6821.82,6434.32) 6821.82,6380 ; 6993.98,6565.99 ccw(c6958.9,6565.99) 6983.7,6590.79 cw(c6958.9,6565.99) 6993.98,6565.99 ; 6993.98,6565.99 cw(c7029.05,6565.99) 7004.25,6590.79 ccw(c7029.05,6565.99) 6993.98,6565.99
NetQ1_1: Q1.1 R25.2 | length 344.5
  Top Layer w18: Q1.1@4797.4,4423.31 4880.67,4423.31 R25.2@4923.98,4380 ; 4891.53,4413.16 cw(c4880.53,4372.11) R25.2@4921.54,4383.27 ; 4882.21,4421.76 ccw(c4923.98,4463.53) 4923.98,4404.46 cw(c4923.98,4463.53) 4882.21,4421.76 ; 4891.72,4412.26 cw(c4863.4,4383.94) 4903.45,4383.94 ccw(c4863.4,4383.94) 4891.72,4412.26
NetQ1_2: Q1.2 R26.1 | length 238.2
  Top Layer w18: R26.1@4606.02,4380 4645,4380 ; Q1.2@4722.6,4423.31 4688.31,4423.31 4645,4380 ; 4645,4380 ccw(c4645,4353.26) 4622.95,4368.39 cw(c4645,4353.26) 4645,4380 ; 4645,4380 cw(c4645,4406.74) 4622.95,4391.61 ccw(c4645,4406.74) 4645,4380
NetR4_1: R4.1 R53.2 U3.1 | length 862.8
  Top Layer w18: R4.1@4691.02,5635 4706,5635 4764.46,5576.54 4877.56,5576.54 R53.2@4936.02,5635 4936.02,5633.98 5045,5525 U3.1@5103.54,5525 ; 4903.58,5601.84 ccw(c4892.58,5642.89) R53.2@4933.59,5631.73 ; R53.2@4936.02,5610.54 cw(c4936.02,5553.95) 4976.04,5593.96 ccw(c4936.02,5553.95) R53.2@4936.02,5610.54 ; R53.2@4936.02,5610.54 ccw(c4936.02,5551.47) 4894.26,5593.24 cw(c4936.02,5551.47) R53.2@4936.02,5610.54 ; 4903.77,5602.74 ccw(c4875.44,5631.06) 4915.5,5631.06 cw(c4875.44,5631.06) 4903.77,5602.74 ; R53.2@4956.55,5631.06 ccw(c4999.08,5631.06) 4969.01,5600.99 cw(c4999.08,5631.06) R53.2@4956.55,5631.06
NetR4_2: R4.2 R6.1 U3.2 | length 1235.2
  Top Layer w18: R6.1@4446.02,5635 R4.2@4568.98,5635 4644.98,5559 4733.08,5559 4757.08,5535 4980,5535 5040,5475 U3.2@5103.54,5475 ; R4.2@4571.41,5631.73 ccw(c4612.42,5642.89) 4601.42,5601.84 ; 4495.58,5635 ccw(c4495.58,5585.44) 4460.54,5620.48 cw(c4495.58,5585.44) 4495.58,5635 ; 4495.58,5635 cw(c4495.58,5684.56) 4460.54,5649.52 ccw(c4495.58,5684.56) 4495.58,5635 ; 4519.42,5635 ccw(c4519.42,5684.56) 4554.46,5649.52 cw(c4519.42,5684.56) 4519.42,5635 ; 4519.42,5635 cw(c4519.42,5585.44) 4554.46,5620.48 ccw(c4519.42,5585.44) 4519.42,5635 ; R4.2@4568.98,5610.54 cw(c4568.98,5551.47) 4610.74,5593.24 ccw(c4568.98,5551.47) R4.2@4568.98,5610.54 ; R4.2@4589.5,5631.06 ccw(c4629.56,5631.06) 4601.23,5602.74 cw(c4629.56,5631.06) R4.2@4589.5,5631.06
NetR8_1: R8.1 R10.2 U3.6 | length 1136.1
  Top Layer w18: R10.2@4686.02,5255 R8.1@4813.98,5255 4813.98,5293.98 4850,5330 ; U3.6@5103.54,5275 5035,5275 4980,5330 4850,5330 ; 4735.58,5255 ccw(c4735.58,5205.44) 4700.54,5240.48 cw(c4735.58,5205.44) 4735.58,5255 ; 4735.58,5255 cw(c4735.58,5304.56) 4700.54,5269.52 ccw(c4735.58,5304.56) 4735.58,5255 ; 4764.42,5255 ccw(c4764.42,5304.56) 4799.46,5269.52 cw(c4764.42,5304.56) 4764.42,5255 ; 4764.42,5255 cw(c4764.42,5205.44) 4799.46,5240.48 ccw(c4764.42,5205.44) 4764.42,5255 ; 4813.98,5293.97 ccw(c4833.61,5293.97) 4824.01,5276.84 cw(c4833.61,5293.97) 4813.98,5293.97 ; 4813.98,5293.97 cw(c4794.34,5293.97) 4803.94,5276.84 ccw(c4794.34,5293.97) 4813.98,5293.97 ; 4850,5330 ccw(c4896.24,5283.75) 4833.63,5264.86 cw(c4896.24,5283.75) 4850,5330 ; R8.1@4816.4,5259.67 cw(c4863.56,5273.89) 4828.73,5308.73 ccw(c4863.56,5273.89) R8.1@4816.4,5259.67
NetR8_2: R8.2 R118.1 U3.7 | length 2828.1
  Top Layer w18: R118.1@4936.02,4955 4970,4955 ; R118.1@4938.21,4957.67 cw(c5002.12,4920.77) 4983.02,4992.06 ; R8.2@4938.3,5252.15 ccw(c4993.71,5278.67) 4977.81,5219.34 ; R118.1@4946.29,4976.71 ccw(c4966.9,5012.41) 4977.57,4972.6 ; R118.1@4953.81,4948.68 cw(c5003.88,4919.8) 4988.92,4975.64 ; 5008.85,5194.35 cw(c4998.73,5156.55) v1@5037.06,5164.4 ; 5010.65,5196.15 ccw(c5048.45,5206.27) v1@5040.6,5167.94 ; 5013.52,5016.04 cw(c5035.41,5003.4) v1@5043.98,5027.18 ; 5013.85,5000.65 ccw(c5003.73,5038.45) v1@5042.06,5030.6 ; 5015.65,4998.85 cw(c5053.45,4988.73) v1@5045.6,5027.06 ; v1(5040,5165) 4950,5255 R8.2@4936.02,5255 4941.02,5260 4985,5260 ; v1(5045,5030) 4970,4955 ; U3.7@5103.54,5225 5020,5225 4985,5260 ; 4970,4955 ccw(c4970,4937.15) 4954.2,4945.45 cw(c4970,4937.15) 4970,4955 ; 4970,4955 cw(c4970,4972.85) 4954.2,4964.55 ccw(c4970,4972.85) 4970,4955 ; 4985,5260 ccw(c4985,5214.19) 4951.18,5245.09 cw(c4985,5214.19) 4985,5260 ; 4995.73,4997.66 ccw(c4964.63,5051.54) v1@5024.72,5035.44 ; 4995.73,4997.66 ccw(c4964.63,5051.54) v1@5024.72,5035.44 ; 4995.73,4997.66 ccw(c4964.63,5051.54) v1@5024.72,5035.44 ; 5004.15,5200.85 ccw(c5040,5236.7) 5040,5186 cw(c5040,5236.7) 5004.15,5200.85 ; 5004.15,5200.85 cw(c4968.3,5165) 5019,5165 ccw(c4968.3,5165) 5004.15,5200.85 ; 5009.15,4994.15 ccw(c4973.3,5030) 5024,5030 cw(c4973.3,5030) 5009.15,4994.15 ; 5009.15,4994.15 cw(c5045,4958.3) 5045,5009 ccw(c5045,4958.3) 5009.15,4994.15 ; 5009.83,5005.8 cw(c5029.42,4971.86) v1@5039.56,5009.72 ; 5009.83,5005.8 cw(c5029.42,4971.86) v1@5039.56,5009.72 ; 5009.83,5005.8 cw(c5029.42,4971.86) v1@5039.56,5009.72 ; R118.1@4936.02,4943.46 ccw(c4936.02,4997.64) 4974.33,4959.33 cw(c4936.02,4997.64) R118.1@4936.02,4943.46 ; R118.1@4936.02,4961.46 ccw(c4936.02,5059.1) 5005.06,4990.06 cw(c4936.02,5059.1) R118.1@4936.02,4961.46 ; R118.1@4936.02,4979.46 ccw(c4936.02,5120.55) 5035.79,5020.79 cw(c4936.02,5120.55) R118.1@4936.02,4979.46 ; R8.2@4936.02,5230.54 cw(c4936.02,5137.73) 5001.65,5203.35 ccw(c4936.02,5137.73) R8.2@4936.02,5230.54 ; R8.2@4936.02,5248.54 cw(c4936.02,5199.19) 4970.92,5234.08 ccw(c4936.02,5199.19) R8.2@4936.02,5248.54 ; R8.2@4950.54,5273.45 ccw(c4983.02,5305.93) 4983.02,5260 cw(c4983.02,5305.93) R8.2@4950.54,5273.45
  Bottom Layer w18: v1(5040,5165) 5050,5155 5050,5035 v1(5045,5030) ; v1@5025.15,5150.15 cw(c4965.16,5090.16) 5050,5090.16 ccw(c4965.16,5090.16) v1@5025.15,5150.15 ; v1@5030.15,5044.85 ccw(c4982.23,5092.77) 5050,5092.77 cw(c4982.23,5092.77) v1@5030.15,5044.85 ; v1@5037.88,5162.88 cw(c5008.62,5133.62) 5050,5133.62 ccw(c5008.62,5133.62) v1@5037.88,5162.88 ; 5050,5068.63 ccw(c5083.63,5068.63) 5059.85,5044.85 cw(c5083.63,5068.63) 5050,5068.63
NetR16_1: R16.1 R19.2 U3.9 | length 1609.4
  Top Layer w18: U3.9@5296.46,5275 5400,5275 5473.98,5348.98 R16.1@5473.98,5535 5473.98,5568.98 ; R19.2@5678.98,5810 5710,5810 ; 5473.98,5481.51 ccw(c5424.42,5481.51) 5459.46,5516.55 cw(c5424.42,5481.51) 5473.98,5481.51 ; 5473.98,5481.51 cw(c5523.53,5481.51) 5488.49,5516.55 ccw(c5523.53,5481.51) 5473.98,5481.51 ; 5473.98,5568.98 ccw(c5485.69,5568.98) 5481.43,5558.06 cw(c5485.69,5568.98) 5473.98,5568.98 ; 5473.98,5568.98 cw(c5462.26,5568.98) 5466.52,5558.06 ccw(c5462.26,5568.98) 5473.98,5568.98 ; 5473.98,5568.98 5501,5596 ; 5501,5596 ccw(c5531.17,5565.82) 5492.55,5547.67 cw(c5531.17,5565.82) 5501,5596 ; 5501,5596 5711,5596 5740,5625 5740,5780 ; 5710,5810 ccw(c5710,5796.82) 5697.87,5801.97 cw(c5710,5796.82) 5710,5810 ; 5710,5810 cw(c5710,5823.18) 5697.87,5818.03 ccw(c5710,5823.18) 5710,5810 ; 5710,5810 5740,5780 ; 5740,5780 ccw(c5708.89,5748.89) 5688.49,5787.87 cw(c5708.89,5748.89) 5740,5780 ; R16.1@5476.26,5540.01 cw(c5506.52,5554.24) 5482.88,5577.88 ccw(c5506.52,5554.24) R16.1@5476.26,5540.01 ; R19.2@5680.15,5803.82 cw(c5696.99,5771.63) 5722.68,5797.32 ccw(c5696.99,5771.63) R19.2@5680.15,5803.82
NetR16_2: R16.2 R119.1 U3.8 | length 1067.7
  Top Layer w18: R119.1@5288.98,5100 5288.98,5217.52 U3.8@5296.46,5225 5425,5225 5545,5345 5545,5483.98 R16.2@5596.02,5535 ; 5291.57,5207.31 ccw(c5277.1,5215.66) U3.8@5292.15,5222.92 ; 5563.58,5501.84 ccw(c5552.58,5542.89) R16.2@5593.59,5531.73 ; 5288.98,5153.49 ccw(c5338.53,5153.49) 5303.49,5118.45 cw(c5338.53,5153.49) 5288.98,5153.49 ; 5288.98,5153.49 cw(c5239.42,5153.49) 5274.46,5118.45 ccw(c5239.42,5153.49) 5288.98,5153.49 ; 5288.98,5195.4 cw(c5326.05,5195.4) 5299.84,5221.62 ccw(c5326.05,5195.4) 5288.98,5195.4 ; 5554.26,5493.24 cw(c5596.02,5451.47) 5596.02,5510.54 ccw(c5596.02,5451.47) 5554.26,5493.24 ; 5563.77,5502.74 ccw(c5535.44,5531.06) 5575.5,5531.06 cw(c5535.44,5531.06) 5563.77,5502.74
NetR21_1: R21.1 R107.1 U3.10 | length 1107.1
  Top Layer w18: U3.10@5296.46,5325 5365,5325 5415,5375 5415,5630 ; R107.1@5413.98,5700 5415,5698.98 5415,5630 ; 5646.53,5651.84 ccw(c5635.53,5692.89) R21.1@5676.54,5681.73 ; R21.1@5678.98,5685 5623.98,5630 5415,5630 ; R107.1@5399.46,5681.55 cw(c5361.95,5644.03) 5415,5644.03 ccw(c5361.95,5644.03) R107.1@5399.46,5681.55 ; 5415,5648.98 cw(c5461.06,5648.98) 5428.49,5681.55 ccw(c5461.06,5648.98) 5415,5648.98 ; 5637.21,5643.24 cw(c5678.98,5601.47) 5678.98,5660.54 ccw(c5678.98,5601.47) 5637.21,5643.24 ; 5646.72,5652.74 ccw(c5618.4,5681.06) 5658.45,5681.06 cw(c5618.4,5681.06) 5646.72,5652.74
NetR24_2: R24.2 U3.3 | length 292.9
  Top Layer w18: R24.2@4931.02,5455 4936.02,5460 4975,5460 ; U3.3@5103.54,5425 5010,5425 4975,5460 ; 4975,5460 ccw(c4975,5434.55) 4953.43,5448.05 cw(c4975,5434.55) 4975,5460 ; 4975,5460 cw(c4975,5488.22) 4952.43,5471.27 ccw(c4975,5488.22) 4975,5460
NetR26_2: R26.2 U1.1 | length 1307.2
  Top Layer w18: R26.2@4483.1,4386.31 ccw(c4465.75,4433.47) 4514.29,4420.46 ; R26.2@4483.98,4380 4483.98,4393.98 4575,4485 4730,4485 4840,4595 4840,4670 ; U1.1@4750,4710 4800,4710 ; 4800,4710 ccw(c4800,4692.56) 4783.87,4699.18 cw(c4800,4692.56) 4800,4710 ; 4800,4710 cw(c4800,4727.44) 4783.87,4720.82 ccw(c4800,4727.44) 4800,4710 ; 4800,4710 4840,4670 ; 4840,4670 ccw(c4794.15,4624.15) 4768.69,4683.79 cw(c4794.15,4624.15) 4840,4670 ; R26.2@4483.98,4404.46 ccw(c4483.98,4429.79) 4501.88,4411.88 cw(c4483.98,4429.79) R26.2@4483.98,4404.46 ; R26.2@4504.5,4383.94 cw(c4578.3,4383.94) 4526.12,4436.12 ccw(c4578.3,4383.94) R26.2@4504.5,4383.94 ; U1.1@4754.56,4716.9 cw(c4771.61,4676.93) 4802.34,4707.66 ccw(c4771.61,4676.93) U1.1@4754.56,4716.9 ; U1.1@4761.62,4700.34 cw(c4782.88,4650.54) 4821.17,4688.83 ccw(c4782.88,4650.54) U1.1@4761.62,4700.34